# Altium PCB I2C_Soil_1.0.0.PcbDoc
Units mm, origin at the board's own origin, x right, y up, seen from the top; angles counter-clockwise.
Board outline 15 x 100 mm, 2 copper layers (L1, L4), stack 1.472 mm thick; 18 components, 14 nets, 55 pads, 80 vias.
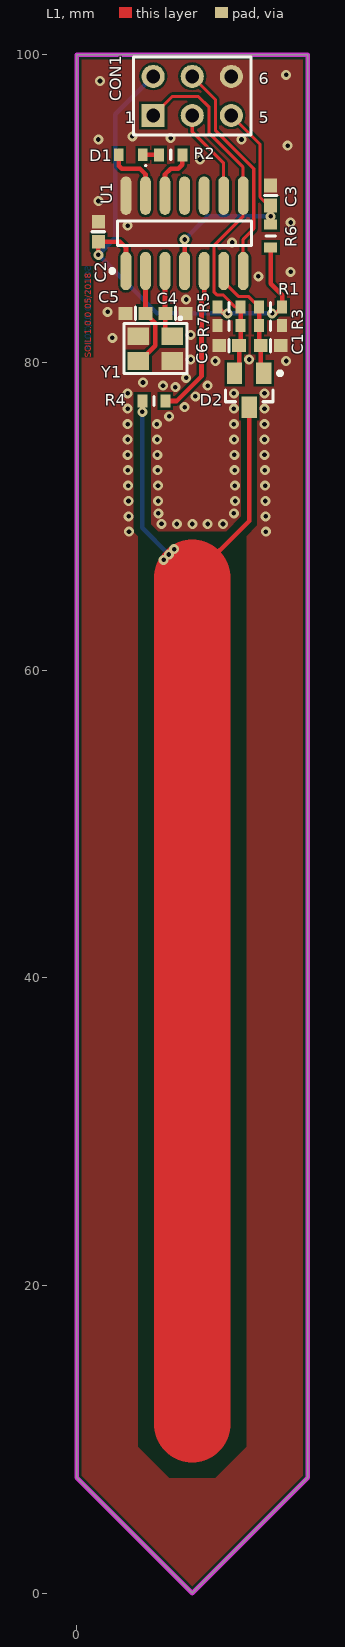
[diagram p0: L1 view]
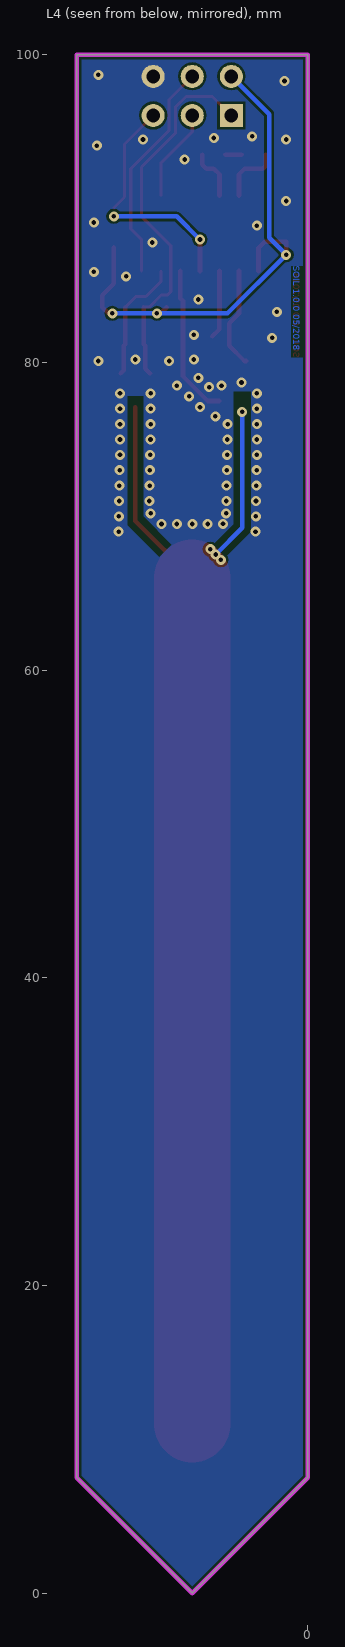
[diagram p1: L4 view, seen from below]
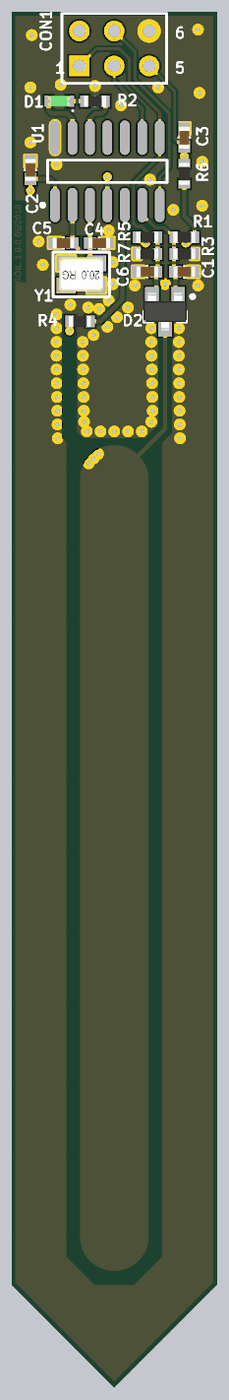
[diagram p2: 3D render of the assembled board from above, using the file's embedded part models]

## Layer stack, top to bottom
Top Solder: solder mask 0.02, Solder Resist, Dk 3.5
L1: signal copper 0.036
Dielectric 1: core 1.4, IS400, Dk 4.2
L4: signal copper 0.036
Bottom Solder: solder mask 0.02, Solder Resist, Dk 3.5

## Board outline
0,7.5 7.5,0 15,7.5 15,100 0,100

## Design rules (kind name [scope] priority, off if disabled: settings)
AssemblyTestPointUsage SilkToBoardRegionClearance_1 [All] p2:
AssemblyTestPointUsage SilkToBoardRegionClearance_2 [All] p3:
Clearance Clearance_Text [IsText vs InPolygon] p1: gap=-0.01 ignorepadtopadclearanceinfootprint=FALSE
Clearance [All] p2: gap=0.152 ignorepadtopadclearanceinfootprint=FALSE except(0: Arc-Hole Track-Hole SMDPad-Hole THPad-Hole Via-Hole Fill-Hole Poly-Hole Region-Hole Text-Hole; 0.203: Poly-Poly)
ComponentClearance ComponentClearance_Battery [All vs InComponent('BT1')] p1: gap=0 collisioncheckmode=3 verticalgap=0 showdistances=FALSE
ComponentClearance [All] p2: gap=0.254 collisioncheckmode=3 verticalgap=0.254 showdistances=FALSE
HoleSize [All] p1: absolutevalues=TRUE maxlimit=6.35 minlimit=0.3 maxpercent=80.000 minpercent=20.000
MatchedLengths DiffPair_DIFF100MatchedLengths [InDifferentialPairClass('DIFF100')] p1: tolerance=0.152 checknetsindiffpair=TRUE checkdiffpairvsdiffpair=FALSE checkxsignals=FALSE checkothers=FALSE
MinimumSolderMaskSliver [All] p1: minsoldermaskwidth=0.1
MinimumSolderMaskSliver SilkscreenOverComponentPads_2 [All] p2: minsoldermaskwidth=0.254
MinimumSolderMaskSliver SilkToSolderMaskClearance_1 [IsPad] p3: minsoldermaskwidth=0.254
MinimumSolderMaskSliver SilkscreenOverComponentPads_1 [All] p4: minsoldermaskwidth=0.254
MinimumSolderMaskSliver SilkToSolderMaskClearance [IsPad] p5: minsoldermaskwidth=0.254
MinimumSolderMaskSliver SilkscreenOverComponentPads [All] p6: minsoldermaskwidth=0.254
PlaneClearance PlaneClearance_Text [IsText] p1: clearance=-0.01
PlaneClearance [All] p2: clearance=0.508
PolygonConnect [All] p1: connectstyle=Direct reliefconductorwidth=0.254 reliefentries=4 polygonreliefangle="90 Angle" airgapwidth=0.254
RoutingVias [All] p1: holewidth=0.3 width=0.7 viastyle="Through Hole" minholewidth=0.3 minwidth=0.65 maxholewidth=1 maxwidth=1.27
SilkToSolderMaskClearance SilkToSolderMaskClearance_2 [IsPad] p1: minsilkscreentomaskgap=0.254 clearancetoexposedcopper=TRUE
SolderMaskExpansion SolderMaskExpansion_Via [IsVia] p1: expansion=0.01 soldermaskfromhole=TRUE
SolderMaskExpansion [All] p2: expansion=0.102
Width [All] p1: maxlimit=5 minlimit=0.152 preferedwidth=0.254
25 further rules are at their usual default settings.

## Components (designator, comment, footprint, x,y, rotation, side; value= is the part's Value field where it differs from the comment)
C1 "1nF" C-0603 12.6,81.1 r180 top
C2 "1u/10V" C-0603 1.4,88.5 r270 top
C3 "1u/10V" C-0603 12.6,90.85 r270 top
C4 "18pF/5%/NP0" C-0603 6.4,83.2 r180 top
C5 "18pF/5%/NP0" C-0603 3.8,83.2 r180 top
C6 "1nF" C-0603 9.9,81.1 r0 top
CON1 "PAD2G06" HDR2X06S 4.96,96.06 r0 top
D1 "LED G" "LED-0603 GREEN" 3.5,93.5 r180 top
D2 "BAT54S" FAIR-SOT23-3_V 11.2,78.2 r270 top
R1 "1M" R-0603 12.6,83.6 r0 top
R2 "330R" R-0603 6.1,93.5 r0 top value=330
R3 "1M" R-0603 12.6,82.4 r180 top
R4 "330R" R-0603 5,77.5 r180 top value=330
R5 "1M" R-0603 9.9,83.6 r180 top
R6 "10k" R-0603 12.6,88.228 r270 top
R7 "1M" R-0603 9.9,82.4 r0 top
U1 "ATtiny441-SSU" 14S1_M 7,88.4 r90 top
Y1 "16MHz" ASX3F 5.1,80.9 r180 top

## Footprints (in the part's own frame and the unit in brackets; to place one, negate y for a bottom-side part, rotate by r counter-clockwise, add the part's x,y. Pads: shape width x height; smd on the part's side, far side on the other; paste and mask are expansions set on the pad)
14S1_M [mm] "SOIC, 14-Leads, Body 8.7x3.9mm, Pitch 1.27mm, IPC Low Density"
  oval 2.5x0.7 smd: 1(-2.45,3.81) 2(-2.45,2.54) 3(-2.45,1.27) 4(-2.45,0) 5(-2.45,-1.27) 6(-2.45,-2.54) 7(-2.45,-3.81) 8(2.45,-3.81) 9(2.45,-2.54) 10(2.45,-1.27) 11(2.45,0) 12(2.45,1.27) 13(2.45,2.54) 14(2.45,3.81)
  silkscreen extent -2.57,-4.35 0.8,4.83, body extent -1.99,-4.37 1.99,4.37, height 1.75
ASX3F [mm]
  rect 1.4x1.15 smd paste-0.03: 1(-1.1,-0.8) 2(1.1,-0.8) 3(1.1,0.8) 4(-1.1,0.8)
  silkscreen extent -2.05,-2.03 2.05,1.63, body extent -1.61,-1.25 1.61,1.25, height 0.81
C-0603 [mm]
  rect 0.9x0.85 smd: 1(-0.65,0) 2(0.65,0)
  silkscreen extent 0,-0.4 0,0.4, body extent -0.8,-0.4 0.8,0.4, height 0.8
FAIR-SOT23-3_V [mm] "SOT23, 3-Leads, Body 3.12x1.5mm, Pitch 0.95mm"
  rect 1.4x1 smd: 1(-1.1,0.95) 2(-1.1,-0.95) 3(1.1,0)
  silkscreen extent -1.22,-1.55 0.75,2.13, body extent -1.35,-1.56 1.35,1.56, height 1.2
HDR2X06S [mm] "Connector; Header; 3x2 Position"
  rect 1.5x1.5 hole 0.9: 1(0,0)
  round 1.5 hole 0.9: 2(0,2.54) 3(2.54,0) 4(2.54,2.54) 5(5.08,0) 6(5.08,2.54)
  silkscreen extent -1.27,-1.27 6.35,3.81
"LED-0603 GREEN" [mm] "SODFL, 2-Leads, Body 0,80x1,65mm, IPC Medium Density"
  rect 0.6x0.8 smd: 1(-0.775,0) 2(0.775,0)
  silkscreen extent -1.02,0.65 -0.93,0.75, body extent -0.81,-0.4 0.81,0.4, height 0.6
R-0603 [mm]
  rect 0.65x0.85 smd: 1(-0.75,0) 2(0.75,0)
  silkscreen extent 0,-0.3 0,0.3, body extent -0.8,-0.4 0.8,0.4, height 0.4

## Part data
C1 C6: library part CMP-00261-4, "SMD Ceramic Capacitor 0603 1nF/100V/5%", Package=0603, Helios ID="CAP-0603 1nF/100V/5%", IFS PN=101148, Type=SMT
C2 C3: library part CMP-00263-4, "SMD Ceramic Capacitor 0603 1u/10V", Package=0603, Helios ID="CAP-0603 1u/10V", IFS PN=105623, Type=SMT
C4 C5: library part CMP-00260-4, "SMD Ceramic Capacitor 0603 18pF/5%/NP0", Package=0603, Helios ID="CAP-0603 18pF/5%/NP0", IFS PN=102556, Type=SMT
CON1: library part CMP-00360-3, "2x3pin dual row pads, 2.54mm", Helios ID=CON-PAD2G06, Type=TH
D1: library part CMP-00413-5, "LED; SMD; 0603; zelená; 4-15mcd; 1,6x0,8x1,1mm; 120°; 2,2÷2,5V; 20mA", Package=LED-0603, Helios ID=DIO-KP-1608SGC, IFS PN=114766, Type=SMT
D2: library part CMP-1670-00010-1, "Schottky Barrier Diode, 30 V, 0.2 A, -55 to 150 degC, 3-Pin SOT23, RoHS, Tape and Reel", Capacitance="1.8E-11 f", Frequency="16 MHz", Frequency Tolerance=30ppm, Load Capacitance="18 pF", Max Operating Temperature=70degC, Min Operating Temperature=-10degC, Package Quantity=1000, Resistance="40 Ohm", ComponentLink1Description="Manufacturer URL", ComponentLink1URL=https://www.fairchildsemi.com/, ComponentLink2Description=Datasheet, ComponentLink2URL=https://www.fairchildsemi.com/datasheets/BA/BAT54S.pdf, ComponentLink3Description="Package Specification", ComponentLink3URL=http://www.fairchildsemi.com/dwg/MA/MA03D.pdf, DatasheetVersion="Rev. 2.3, 04/2016", ESR="40 Ohm", Height="0.9 mm", Length="5 mm", Mount="Surface Mount", PackageDescription="3-Pin Small Outline Transistor, Body 2.92 x 1.325 mm, Pitch 0.95 mm", PackageReference=SOT23-3, Packaging="Tape and Reel", Pins=4, REACH SVHC="No SVHC", RoHSCompliant=True, Tolerance=30ppm, Width="3.2 mm"
R1 R3 R5 R7: library part CMP-00067-5, "SMD Resistor 0603 1M", Package=0603, Helios ID="RES-0603 1M", IFS PN=103343, Type=SMT
R2 R4: library part CMP-00084-5, "SMD Resistor 0603 330R", Package=0603, Helios ID="RES-0603 330R", IFS PN=102576, Type=SMT
R6: library part CMP-00036-5, "SMD Resistor 0603 10k", Package=0603, Helios ID="RES-0603 10k", IFS PN=100043, Type=SMT
U1: library part CMP-0093-00132-2, "8-bit AVR Microcontroller, 20MHz, 2.7-5.5V, 4KB Flash, 256 Bytes EEPROM, 256 Bytes SRAM, 14-pin SOIC, Industrial Grade (-40°C to 85°C), Pb-Free", Code_IPC=SOIC127P600-14, Code_JEDEC=MS-012-AB, ComponentLink1Description="Manufacturer URL", ComponentLink1URL=http://www.atmel.com/, ComponentLink2Description="ATtiny24/44/84 Datasheet", ComponentLink2URL=http://www.atmel.com/dyn/resources/prod_documents/doc8006.pdf, ComponentLink3Description="ATtiny24/44/84 Summary", ComponentLink3URL=http://www.atmel.com/dyn/resources/prod_documents/8006S.pdf, DatasheetVersion="revK, Oct-2010", PackageDescription="14-Lead, 0.150â€? Wide Body, Plastic Gull Wing Small Outline Package (SOIC)", PackageReference=14S1, PackageVersion="revA, Feb-2002", RevisionNote="DatasheetVersion updated. Removed ComponentAvailability note. URLs added."
Y1: library part CMP-00507-4, "Crystal 16 MHz SMD, package 3.2x2.5mm", Helios ID=CRY-ASX3F-16M-FE140E3, IFS PN=100681, Type=SMT

## Via types
v1: diameter 0.65, hole 0.3, L1 to L4, 80 vias

## Nets (pads, with @x,y where several pads share a name; then routed paths per layer and width w, separated by ;. In a path a pad name is that pad's centre, name@x,y a point inside that pad or via, vN(x,y) a via of type N, cw(c..) or ccw(c..) an arc to the next point about the centre after c; other vN are vias at no path point)
EXCITATION: R4.1 U1.5 | length 9.9
  L1 w0.3: R4.1 6.5,77.5 8.1,79.1 8.1,84 8.27,84.17 U1.5
GND: C1.1 C2.1 C3.1 C4.1 C5.2 C6.1 CON1.6 R3.1 R7.1 U1.14 Y1.2 Y1.4
  other v1: 3.389,69 12.289,69 5.498,69.509 6.5,69.5 7.5,69.5 8.5,69.5 9.5,69.5 3.371,70 12.271,70 5.3,70.2 10.2,70.2 3.353,71 5.289,71 10.289,71 12.253,71 3.336,72 5.271,72 10.271,72 12.236,72 3.318,73 5.253,73 10.253,73 12.218,73 3.3,74 5.236,74 10.236,74 12.2,74 3.3,75 5.218,75 10.218,75 12.2,75 3.3,76 5.2,76 10.2,76 12.2,76 6,76.5 3.3,77 10.2,77 12.2,77 7,77.1 7.7,77.8 3.3,78 10.2,78 12.2,78 6.4,78.4 5.6,78.5 8.5,78.5 4.3,78.7 7.1,79 9,80.1 13.6,80.1 7.4,80.2 11.2,80.2 2.3,81.6 7.4,81.8 2,83.3 7.1,84.1 11.8,85.6 13.9,85.9 10.1,87.8 3.3,88.9 13.9,89.1 1.4,90.5 8,93.2 13.7,94.1 1.4,94.5 10.7,94.5 6.1,94.6 3.6,94.7 1.5,98.3 13.6,98.7
MISO: C6.2 CON1.1 D2.2 R5.1 R7.2 U1.8 | length 24.8
  L1 w0.2: CON1.1 6.2,97.3 7.9,97.3 8.6,96.6 8.6,94.9 10.81,92.69 U1.8 10.81,89.51 8.9,87.6 8.9,84.6 9.1,84.4 9.5,84.4 10.3,83.6 R5.1
  L1 w0.3: D2.2 10.55,79.6 C6.2 10.65,81.2 R5.1
MOSI: CON1.4 U1.7 | length 14.6
  L1 w0.2: CON1.4 9,97.1 9,95.1 11.5,92.6 11.5,88.7 10.81,88.01 U1.7
NetC4_2: C4.2 U1.3 Y1.1 | length 4.4
  L1 w0.3: U1.3 5.73,83.22 C4.2 5.75,82.15 Y1.1
NetC5_1: C5.1 U1.2 Y1.3 | length 6.6
  L1 w0.3: Y1.3 4.103,80.1 5.1,81.097 5.1,82.543 4.45,83.193 C5.1 4.46,83.21 U1.2
NetD1_1: D1.1 R2.1 | length 1.1
  L1 w0.3: D1.1 R2.1
NetD1_2: D1.2 U1.13 | length 4.1
  L1 w0.3: D1.2 2.725,92.8 2.925,92.6 4.103,92.6 4.46,92.243 U1.13
NetR2_2: R2.2 U1.12 | length 3.4
  L1 w0.3: U1.12 5.73,92.23 6.1,92.6 6.6,92.6 6.85,92.85 R2.2
RESET: C3.2 CON1.5 R6.1 U1.4 | length 15.3
  L1 w0.2: CON1.5 11.9,94.2 11.9,90.75 C3.2@12.6,90.05
  L1 w0.3: U1.4 v1(7,88)
  L4 w0.3: v1(7,88) 8.5,89.5 v1(12.6,89.5)
SCK: CON1.3 U1.9 | length 6.1
  L1 w0.2: CON1.3 7.5,95 9.54,92.96 U1.9
SENSE_LOW: C1.2 D2.1 R1.1 R3.2 U1.6 | length 8.1
  L1 w0.2: U1.6 9.54,85.26 10.5,84.3 11.15,84.3 R1.1
  L1 w0.3: R1.1 11.85,81.2 C1.2 11.95,79.5 D2.1
SENSOR_TRACK: D2.3 R4.2 | length 77.6
  L1 w0.3: 7.5,66 11.2,69.7 D2.3
  L1 w5: 7.5,11 7.5,66
  L4 w0.3: v1(4.25,76.8) 4.25,69.25 v1(5.982,67.518)
  other v1: 5.638,67.174 6.326,67.862
VCC_CPU: C2.2 CON1.2 R1.2 R5.2 R6.2 U1.1 | length 36.1
  L1 w0.3: v1(1.4,87) C2.2 2.8,87.85 3.19,87.46 U1.1 ; R5.2 9.557,83.193 v1(9.8,83.193) ; R6.2 12.6,85.132 13.35,84.382 R1.2 12.943,83.193 v1(12.7,83.193)
  L4 w0.3: CON1.2 2.5,96.14 2.5,88.1 v1(1.4,87) 5.207,83.193 v1(9.8,83.193) v1(12.7,83.193)
pads on no net: U1.10 U1.11

## Polygon pours and split planes (outlines as drawn)
GND on L4 "L02_GND_P052" (solid, pour order 52): 7.5,0 15,7.5 15,100 0,100 0,7.5
GND on L1 "L01_GND_P054" (solid, remove dead copper, pour order 54): 7.5,0 15,7.5 15,100 0,100 0,7.5

## Keep-outs
Keep-Out Layer:
  the board outline again, w0.3

## Other copper
L1:
  pour cut-out: 4,69 10.998,69 11,9.5 9,7.5 6,7.5 4,9.5
  pour cut-out: 10.7,77.1 11.7,77.1 11.7,69.413 9.646,67.359 8.852,68.152 10.7,70
  pour cut-out: 3.7,78.077 4.8,78.077 4.8,69.5 6.382,67.918 5.583,67.119 3.7,69.002
  text "SOIL 1.0.0 05/2018" at 1.1,80.3 h0.75 r90
L4:
  pour cut-out: 10.7,77.8 11.7,77.8 11.7,69.413 9.646,67.359 8.852,68.152 10.7,70
  pour cut-out: 3.7,78.1 4.8,78.1 4.8,69.5 6.382,67.918 5.583,67.119 3.7,69.002
  text "SOIL 1.0.0 05/2018" at 1.1,86.3 h0.75 r90

## Text inside footprints (layer, text, board x,y; h text height)
CON1: Top Overlay "5" at 11.818,95.552 h0.76; Top Overlay "6" at 11.818,98.092 h0.76; Top Overlay "1" at 3.1,95.552 h0.76